# Altium PCB touch.PcbDoc
Units mil, origin at the board's own origin, x right, y up, seen from the top; angles counter-clockwise.
Board outline 6000 x 4000 mil, 2 copper layers (Top Layer, Bottom Layer); 6 components, 4 nets, 14 pads, 0 vias.
Unrouted connection lines stored in the file: 6.
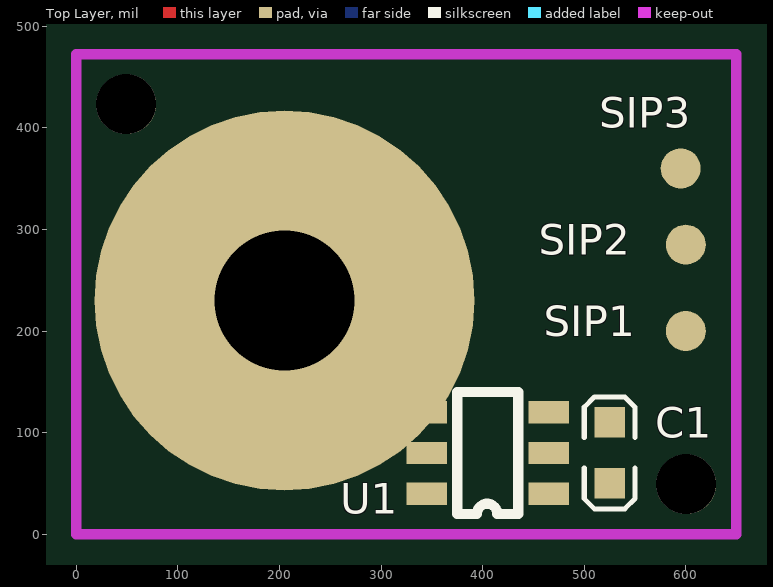
[diagram p0: Top Layer view]
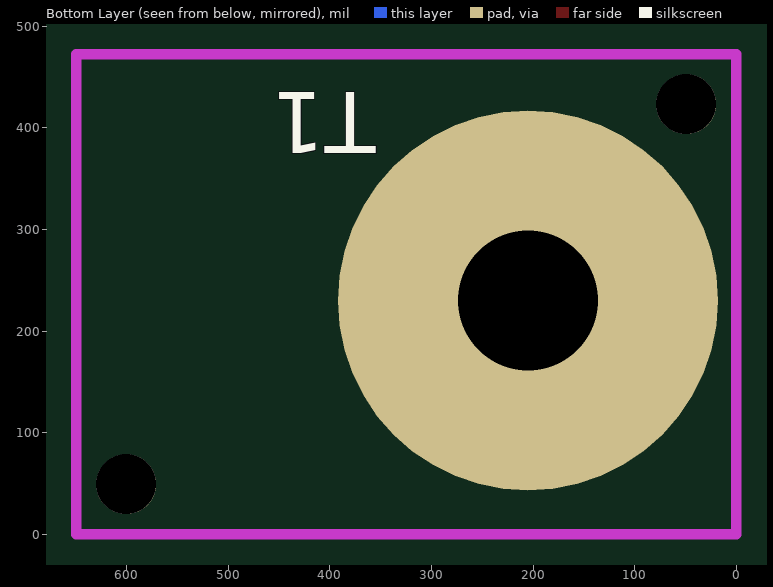
[diagram p1: Bottom Layer view, seen from below]

## Layer stack, top to bottom
Top Solder: solder mask 0.4, Solder Resist, Dk 3.5
Top Layer: signal copper 1.4
Dielectric 1: dielectric 12.6, FR-4, Dk 4.8
Bottom Layer: signal copper 1.4
Bottom Solder: solder mask 0.4, Solder Resist, Dk 3.5

## Board outline
-1125,-1675 4875,-1675 4875,2325 -1125,2325

## Design rules (kind name [scope] priority, off if disabled: settings)
Clearance [All] p1: gap=10
PolygonConnect [All] p1: connectstyle=Relief reliefconductorwidth=10 reliefentries=4 polygonreliefangle="90 Angle" airgapwidth=10
RoutingVias [All] p1: holewidth=28 width=50 viastyle="Through Hole" minholewidth=28 minwidth=50 maxholewidth=28 maxwidth=50
SolderMaskExpansion [All] p1: expansion=4
Width [All] p1: maxlimit=10 minlimit=10 preferedwidth=10
30 further rules are at their usual default settings.

## Components (designator, comment, footprint, x,y, rotation, side; value= is the part's Value field where it differs from the comment)
C1 "105K16V" C0603 525,50 r90 top
SIP1 "SIP1" "SIP - 1MM" 600,200 r90 top
SIP2 "SIP1" "SIP - 1MM" 600,285 r90 top
SIP3 "SIP1" "SIP - 1MM" 595,360 r90 top
T1 "TP" "touch 按键" 205,230 r180 bottom
U1 "BS83A02A-4" U-SOT-23-6 465,40 r270 top

## Footprints (in the part's own frame and the unit in brackets; to place one, negate y for a bottom-side part, rotate by r counter-clockwise, add the part's x,y. Pads: shape width x height; smd on the part's side, far side on the other; paste and mask are expansions set on the pad)
C0603 [mil]
  rect 30x30 smd: 1(0,0) 2(60,0)
  silkscreen extent -25,-25 85,25, body extent -1,-15 61,16, height 12
"SIP - 1MM" [mm]
  round 1 smd: 1(0,0)
"touch 按键" [mm]
  round 9.5 hole 3.5: 1(0,0)
U-SOT-23-6 [mil]
  rect 22x40 smd: 1(0,0) 2(-40,0) 3(-80,0) 4(-80,-120) 5(-40,-120) 6(0,-120)
  silkscreen extent -100,-90 20,-30, body extent -101,-127 19,10, height 59

## Part data
C1: library part C0603X7R-105K16V, "贴片电容-陶瓷"
SIP1 SIP2 SIP3: "单排排针，2.54mm针距，1P,针总长11.1mm,黑色"

## Free pads (board coordinates)
  round 59.06 hole 59.06: 0(49.21,423.23) 0(600.39,49.21)

## Nets (pads, with @x,y where several pads share a name; then routed paths per layer and width w, separated by ;. In a path a pad name is that pad's centre, name@x,y a point inside that pad or via, vN(x,y) a via of type N, cw(c..) or ccw(c..) an arc to the next point about the centre after c; other vN are vias at no path point)
NetC1_1: C1.1 SIP1.1 U1.1
NetC1_2: C1.2 SIP2.1 U1.2
NetSIP3_1: SIP3.1 U1.3
NetT1_1: T1.1 U1.6
pads on no net: U1.4 U1.5

## Keep-outs
Keep-Out Layer:
  lines w10: 0,0 649.61,0 649.61,472.44 0,472.44 0,0